# EAGLE board PPGShieldSmall-V0.2-EC (EAGLE 9.5.2)
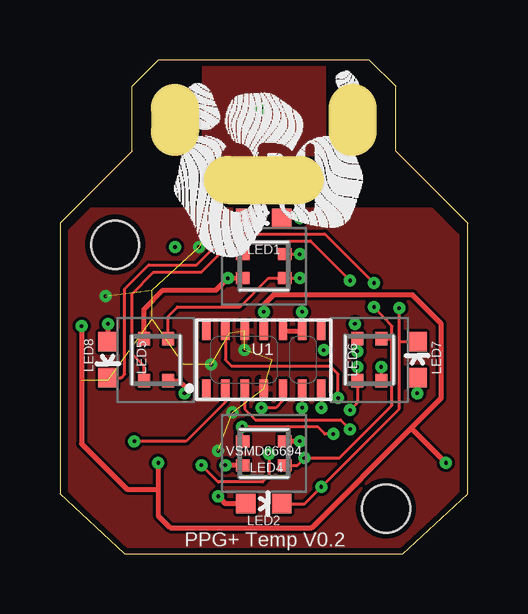
[diagram p0: board, top side]
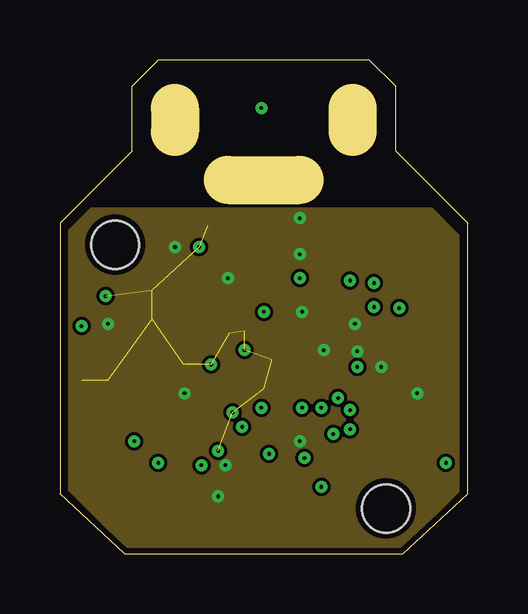
[diagram p1: board, inner layer VCC]
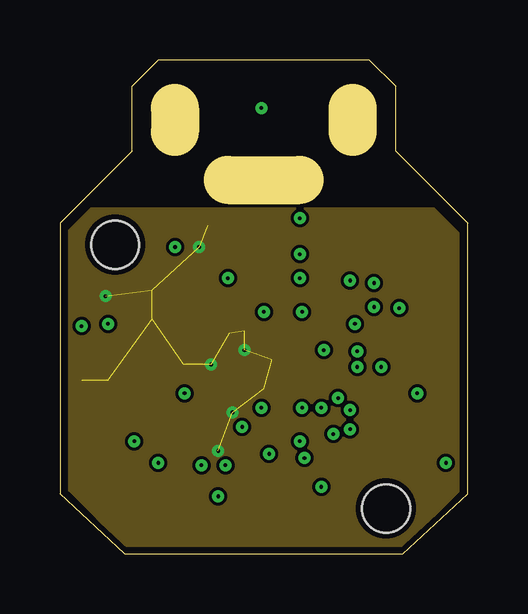
[diagram p2: board, inner layer GND]
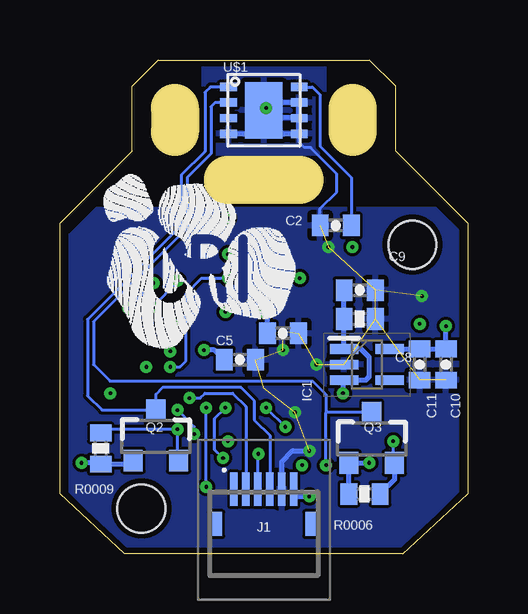
[diagram p3: board, bottom side, seen from below]

Size 17 x 20.6 mm. Coordinates in mm from the lower left corner, seen from the top.
Outline: 12.9,20.6 4.1,20.6 3,19.5 3,16.8 0,13.8 0,2.5 2.7,0 14.3,0 17,2.5 17,13.8 14,16.8 14,19.5 12.9,20.6
Copper layers (1+2*3+16): Top 0.018mm / dielectric 0.36mm / VCC 0.035mm / dielectric 0.71mm / GND 0.035mm / dielectric 0.36mm / Bottom 0.018mm
Design rules "eC_4Layer_PClass7_BaseCopperO18-I35 *": minimum track width 0.125mm, minimum drill 0.15mm, track to track 0.125mm, track to pad 0.125mm, pad to pad 0.125mm, via to via 0.125mm, smd to smd 0mil, copper to edge 0.25mm, drill to drill 0.35mm, minimum pad ring 0.175mm, minimum via ring 0.175mm, stop-mask expansion 0mil, vias tented up to drill 0.45mm, thermal gap 0.2mm
Net classes: 1 pcbway_smallest: width 0.102 mm, drill 0.2 mm, clearance 0.102 mm; 2 pcbway_cheap: width 0.152 mm, drill 0.3 mm, clearance 0.152 mm; 3 pcbway_5mil: width 0.127 mm, drill 0.25 mm, clearance 0.127 mm; 4 EC-drill0.15: width 0.1 mm, drill 0.15 mm, clearance 0.1 mm; 5 Eurocircuits-Classe7-drill0.15: width 0.125 mm, drill 0.15 mm, clearance 0.125 mm
Holes 2 mm at 2.3,12.9 13.6,1.9
Milling: 3 lines

## Footprints (pad centres in the part's own frame; a part is rotated, then mirrored left to right if it is on the bottom)
0402-CAP = smd 0.7 x 0.9: 1 -0.65,0; 2 0.65,0
0402-RES = smd 0.7 x 0.9: 1 -0.65,0; 2 0.65,0
SOT65P210X110-5N = smd 1.2 x 0.4: 1 -0.95,0.65; 2 -0.95,0; 3 -0.95,-0.65; 4 0.95,-0.65; 5 0.95,0.65
59453061110EDHLF = smd 0.3 x 1.4: 1 -1.25,0.1; 2 -0.75,0.1; 3 -0.25,0.1; 4 0.25,0.1; 5 0.75,0.1; 6 1.25,0.1 | smd 0.52 x 1: MP1 -1.99,-1.35; MP2 1.99,-1.35
VSMD66694 = smd 0.55 x 0.5: 1 -0.875,0.5; 2 -0.875,-0.5; 3 0.875,-0.5; 4 0.875,0.5
LED-0603 = smd 0.8 x 0.8: A 0,-0.75; C 0,0.75
SOT23-3 = smd 0.8 x 0.9: 1 -0.95,-1; 2 0.95,-1; 3 0,1.1
OLGA-14 = smd 0.75 x 0.35: 1 -1.2,2.4; 2 -1.2,1.6; 3 -1.2,0.8; 4 -1.2,0; 5 -1.2,-0.8; 6 -1.2,-1.6; 7 -1.2,-2.4; 8 1.2,-2.4; 9 1.2,-1.6; 10 1.2,-0.8; 11 1.2,0; 12 1.2,0.8; 13 1.2,1.6; 14 1.2,2.4
TDFN-08 = smd 0.7 x 0.35: 1 -1.475,0.975; 2 -1.475,0.325; 3 -1.475,-0.325; 4 -1.475,-0.975; 5 1.475,-0.975; 6 1.475,-0.325; 7 1.475,0.325; 8 1.475,0.975 | smd 1.58 x 2.35: EXP 0,0

## Placement (x,y rotation side)
C2  1uF  [0402-CAP]  5.5,13.7 0 bottom
C5  1uF  [0402-CAP]  9.5,8.1 0 bottom
C6  1uF  [0402-CAP]  7.7,9.2 180 bottom
C8  10uF  [0402-RES]  4.5,9.8 180 bottom
C9  0.1uF  [0402-CAP]  4.5,11 0 bottom
C10  0.1uF  [0402-CAP]  0.9,7.9 270 bottom
C11  4.7uF  [0402-CAP]  2,7.9 270 bottom
IC1  TLV70018DCKR  [SOT65P210X110-5N]  4.2,7.9 0 bottom
J1  59453-061110EDHLF  [59453061110EDHLF]  8.5,2.6 0 bottom
LED1  VSMD66694  [VSMD66694]  8.5,12 0 top
LED2  VSMD66694  [VSMD66694]  8.5,4.2 180 top
LED3  [LED-0603]  8.5,14 90 top
LED4  [LED-0603]  8.5,2.1 270 top
LED5  VSMD66694  [VSMD66694]  4,8.1 90 top
LED6  VSMD66694  [VSMD66694]  12.9,8.1 270 top
LED7  [LED-0603]  14.9,8.1 0 top
LED8  [LED-0603]  2,8.1 180 top
Q2  200mA/50V  [SOT23-3]  13,4.9 0 bottom
Q3  200mA/50V  [SOT23-3]  4,4.8 0 bottom
R0006  4.7K  [0402-RES]  4.3,2.5 0 bottom
R0009  4.7K  [0402-RES]  15.3,4.4 90 bottom
U1  MAX30105  [OLGA-14]  8.5,8.1 90 top
U$1  MAX30205MTA+  [TDFN-08]  8.5,18.5 0 bottom
U$3  LOGO-CRI-NEW-110MM-BOTTOM-SILK  [LOGO_CRI-NEW-BMP10MM-BOTTOM]  8.8,15.9 0 bottom
U$4  LOGO-CRI-NEW-110MM-BOTTOM-SILK  [LOGO_CRI-NEW-BMP10MM-BOTTOM]  11,12.1 0 top

## Library data of the parts
C2 C5 C6 = movuino; DIELECTRIC: MLCC, X5R; MF: Murata Electronics; MPN: GRM155R61A105KE15D; OC_MOUSER: 81-GRM155R61A105KE15; OC_RS: 7235199; TOLERANCE: 10%; VOLTAGE: 10V
C8 = movuino; MF: Murata Electronics; OC_MOUSER: 81-GRM155R60J106ME4D; OC_RS: 8467274; TOLERANCE: 20%; VOLTAGE: 6.3V
C9-C11 = movuino; DIELECTRIC: MLCC, X5R; MF: Murata Electronics; MPN: GRM155R61C104KA88D; OC_MOUSER: 81-GRM155R61C104KA8D; OC_RS: 7235200; TOLERANCE: 10%; VOLTAGE: 16V
IC1 = movuino; DESCRIPTION: 200-mA, Low-IQ, Low-Dropout Regulator for Portable Devices; HEIGHT: 1.1mm; MANUFACTURER_NAME: Texas Instruments; MANUFACTURER_PART_NUMBER: TLV70018DCKR; MOUSER_PART_NUMBER: 595-TLV70018DCKR; MOUSER_PRICE-STOCK: https://www.mouser.com/Search/Refine.aspx?Keyword=595-TLV70018DCKR
J1 LED3 LED4 LED7 LED8 = movuino
LED1 LED2 LED5 LED6 = movuino; DESCRIPTION: Red + IR LED 660/940nm 60deg SMD 1206; HEIGHT: 0.97mm; MANUFACTURER_NAME: Vishay; MANUFACTURER_PART_NUMBER: VSMD66694; MOUSER_PART_NUMBER: 78-VSMD66694; MOUSER_PRICE-STOCK: https://www.mouser.com/Search/Refine.aspx?Keyword=78-VSMD66694
Q2 Q3 = SparkFun-DiscreteSemi; PROD_ID: TRANS-00830
R0006 R0009 = movuino; MF: TE Connectivity; MPN: CRG0402F4K7; OC_MOUSER: 279-CRG0402F4K7; OC_RS: 6678794; POWER_RATING: 0.063W; TOLERANCE: 1%
U1 = movuino; PROD_ID: IC-13510
U$1 = circuitects
U$3 U$4 = movuino_aestheticsV0

## Nets
1.8V [Eurocircuits-Classe7-drill0.15]: C6.2 C10.1 C11.1 IC1.5 Q2.1 Q3.1 R0006.1 R0009.1 U1.11
3.3V [Eurocircuits-Classe7-drill0.15]: C5.1 C8.2 C9.1 IC1.1 IC1.3 J1.6 LED1.2 LED1.4 LED2.2 LED2.4 LED3.A LED4.A LED5.2 LED5.4 LED6.2 LED6.4 LED7.A LED8.A U1.9 U1.10
3V3 [Eurocircuits-Classe7-drill0.15]: C2.2 U$1.8
G_DRV [Eurocircuits-Classe7-drill0.15]: LED3.C LED4.C LED7.C LED8.C U1.7
GND [Eurocircuits-Classe7-drill0.15]: C2.1 C5.2 C6.1 C8.1 C9.2 C10.2 C11.2 IC1.2 J1.5 U1.4 U1.12 U$1.4 U$1.5 U$1.6 U$1.7 U$1.EXP
INT_PPG [Eurocircuits-Classe7-drill0.15]: J1.2 U1.13
IR_DRV [Eurocircuits-Classe7-drill0.15]: LED1.1 LED2.1 LED5.1 LED6.1 U1.6
LV_SCL [Eurocircuits-Classe7-drill0.15]: Q3.2 R0006.2 U1.2
LV_SDA [Eurocircuits-Classe7-drill0.15]: Q2.2 R0009.2 U1.3
R_DRV [Eurocircuits-Classe7-drill0.15]: LED1.3 LED2.3 LED5.3 LED6.3 U1.5
SCL [Eurocircuits-Classe7-drill0.15]: J1.3 Q3.3 U$1.2
SDA [Eurocircuits-Classe7-drill0.15]: J1.4 Q2.3 U$1.1

## Tracks (layer width: path | path; a pad name or v marks a point on that pad's centre or on a via)
1.8V  (via drill 0.15 pad 0.5)
  Top 0.2: v4.1,3.8 4.1,2.7 | 4.1,2.7 4.1,1.6 4.6,1.1 10.5,1.1 14.7,5.3 | U1.11 v8.5,10.1 8.5,10.4 8.9,10.8 14.7,10.8 15.9,9.6 15.9,6.5 14.7,5.3 | v0.9,9.5 0.9,4.6 2.8,2.7 4.1,2.7 | v16.1,3.8 14.7,5.2 14.7,5.3
  Bottom 0.2: R0006.1 Q3.1 v4.1,3.8 | C6.2 8.35,9.95 v8.5,10.1 | Q2.1 14.1,3.75 R0009.1 15.35,3.8 v16.1,3.8 | IC1.5 C11.1 C10.1 v0.9,9.5
3.3V  (via drill 0.15 pad 0.5)
  Top 0.125: LED6.4 v13.4,7.8 | LED1.4 v10,12.5 | LED3.A v10,14
  Top 0.2: v10.1,10.1 U1.9 U1.10 | LED8.A v2,9.6 | LED4.A 6.9,2.1 v6.6,2.4 | LED2.4 v6.9,3.7 | v10,4.7 LED2.2 | LED1.2 v7,11.5 6.5,11 4.3,11 3.5,10.2 LED5.4 | LED6.2 v12.4,8.45 | LED7.A v14.9,6.7 | LED5.2 4.97,7.22 5.2,7 v5.2,6.7
  Bottom 0.2: C9.1 C8.2 IC1.1 4.45,8.55 4.1,8.2 4.1,7.4 4.25,7.25 IC1.3 5.2,7.2 v5.2,6.7 | J1.6 7.25,2.4 v6.6,2.4 | C5.1 10.55,8.5 v11,8.5
  other vias: 12.3,9.6 4.8,12.8
  pour VCC: 0.4,13.5 1.3,14.4 15.5,14.4 16.6,13.3 16.6,2.6 14.3,0.3 2.75,0.3 0.4,2.65
3V3
  Bottom 0.125: U$1.8 6.47,19.48 6.15,19.15 6.15,17 4.85,15.7 C2.2
G_DRV  (via drill 0.15, 0.15 pad 0.5)
  Top 0.125: LED8.C 2.55,7.35 2.7,7.5 2.7,11.05 3.7,12.05 5.7,12.05 7,13.35 7.75,13.35 | v13.1,11.3 11.05,13.35 7.75,13.35 | LED3.C 7.75,13.35 | U1.7 v10.9,6.1 | LED4.C 10.2,2.1 v10.9,2.8 14.15,6.05 14.15,8.85 | 14.15,8.85 v14.15,10.25 | LED7.C 14.15,8.85
  Bottom 0.125: v14.15,10.25 v13.1,11.3 | v10.9,2.8 v10.9,6.1
GND  (via drill 0.15 pad 0.5)  (15 unrouted)
  Bottom 0.125: C2.1 6.15,14.4 5.45,15.1 5.45,15.85 6.55,16.95 6.8,16.95 7.03,17.17 U$1.5
  Bottom 0.2: v8.4,18.6 8.18,18.83 U$1.7 U$1.6 | U$1.4 8.68,17.52 8.3,17.9 8.3,18.1 | 8.3,18.1 8.3,18.2 | 8.3,18.2 8.3,18.3 U$1.EXP | U$1.6 U$1.5 7.72,17.52 8.3,18.1 | U$1.6 7.05,18.2 8.3,18.2 | J1.5 7.75,3.85 7.3,4.3 v6.6,4.3
  other vias: 7.7,8.5 1.9,10.75 5.8,12.8 7.2,5.9 6.3,7.9
  pour Top: 0.4,13.5 1.3,14.4 15.5,14.4 16.6,13.3 16.6,2.6 14.3,0.3 2.7,0.3 0.4,2.6
  pour Bottom: 0.4,13.5 1.3,14.4 15.5,14.4 16.6,13.3 16.6,2.6 14.3,0.3 2.7,0.3 0.4,2.6
  pour Bottom: 7.3,16.7 11,16.7 11,20.4 6,20.4 6,16.8 6,16.7
  pour Top: 6,16.7 11,16.7 11,20.4 6,20.4
  pour GND: 0.4,13.5 1.3,14.4 15.6,14.4 16.6,13.4 16.6,2.6 14.35,0.35 2.7,0.35 0.4,2.65
INT_PPG  (via drill 0.15 pad 0.5)
  Top 0.125: v11.6,6.5 11.6,7.5 11.25,7.85 7.15,7.85 6.9,8.1 U1.13
  Bottom 0.125: J1.2 9.25,6.15 9.8,6.7 10.95,6.7 11.15,6.5 v11.6,6.5
IR_DRV  (via drill 0.15 pad 0.5)
  Top 0.125: LED5.1 3.5,7.85 3,8.35 3,10.85 3.9,11.75 5.9,11.75 7.2,13.05 7.65,13.05 | 7.65,13.05 10.45,13.05 v12.1,11.4 | v13.1,10.3 13.85,9.5 13.85,9 | 13.85,9 13.85,6.2 11.65,4 v10.2,4 9.9,3.7 LED2.1 | U1.6 v10.1,6.1 | LED1.1 7.62,13.03 7.65,13.05 | LED6.1 13.82,8.97 13.85,9
  Bottom 0.125: v13.1,10.3 v12.1,11.4 | v10.2,4 10.55,4.35 10.55,5.65 v10.1,6.1
LV_SCL  (via drill 0.15 pad 0.5)
  Top 0.125: U1.2 6.9,6.35 5.25,4.7 v3.1,4.7
  Bottom 0.125: Q3.2 3.1,3.85 v3.1,4.7
  Bottom 0.2: Q3.2 3.05,3.1 R0006.2
LV_SDA  (via drill 0.15 pad 0.5)
  Top 0.125: v12.1,5.2 11.7,5.6 8.15,5.6 7.7,6.05 U1.3
  Bottom 0.125: Q2.2 12.1,3.95 v12.1,5.2 15.15,5.2 R0009.2
R_DRV  (via drill 0.15, 0.15 pad 0.5)
  Top 0.125: LED5.3 4.5,9.9 4.9,10.3 7.5,10.3 8.7,11.5 LED1.3 v10,11.5 | LED2.3 7.6,4.72 v7.6,5.3 10.75,5.3 11.05,5 v11.4,5 | U1.5 9.3,6.4 9,6.1 v8.4,6.1 | v12.1,6 12.4,6.3 LED6.3 v12.4,7.8
  Bottom 0.125: v12.4,7.8 12,7.8 11.75,8.05 11.75,10.85 11.1,11.5 v10,11.5 | v8.4,6.1 v7.6,5.3 | v11.4,5 11.4,5.3 v12.1,6
SCL  (via drill 0.15 pad 0.5)
  Top 0.125: v8.73,4.17 8.73,3.28 8.45,3 6.6,3 v5.9,3.7
  Bottom 0.125: J1.3 8.75,4.15 v8.73,4.17 | v5.9,3.7 5.9,5.9 | 5.9,5.9 5.9,6.65 6.46,7.21 14.91,7.21 15.6,7.9 15.6,9.68 11.69,13.6 11.69,15.69 10.7,16.68 10.7,18.65 10.52,18.83 U$1.2 | Q3.3 5.9,5.9
SDA
  Bottom 0.125: J1.4 8.25,4.95 8.9,5.6 8.9,6.4 9.46,6.96 12.7,6.96 13,6.66 Q2.3 15.25,6 15.85,6.6 15.85,9.79 11.94,13.7 11.94,15.8 10.95,16.79 10.95,19.25 10.73,19.48 U$1.1

## Text on the board
tPlace: PPG+ Temp V0.2